# Altium PCB EMG_shield.PcbDoc (part 1 of 3)
Units mm, origin at the board's own origin, x right, y up, seen from the top; angles counter-clockwise.
Board outline 20.05 x 63.8 mm, 6 copper layers (Top Layer, GND/PWR1, SIG1, SIG2, GND/PWR2, Bottom Layer), stack 0.957 mm thick; 130 components, 175 nets, 615 pads, 662 vias.
Unrouted connection lines stored in the file: 5.
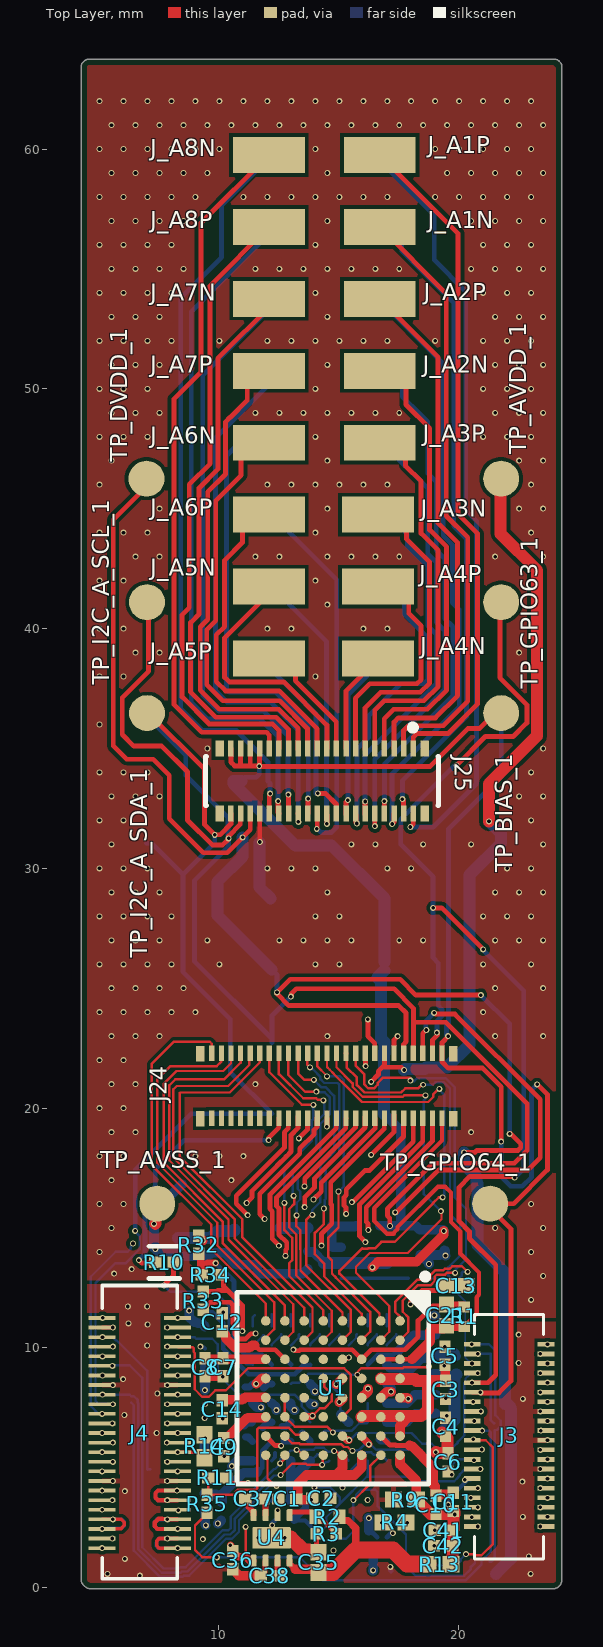
[diagram p0: Top Layer view]
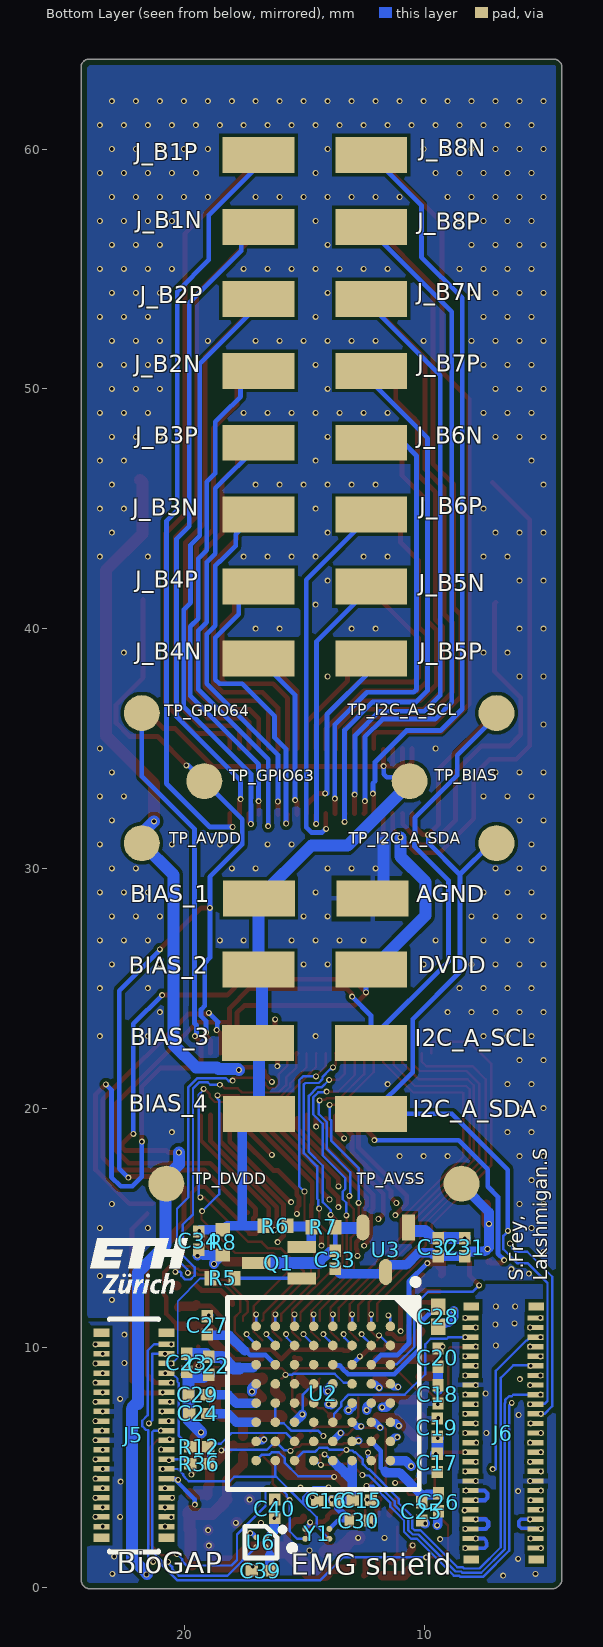
[diagram p1: Bottom Layer view, seen from below]
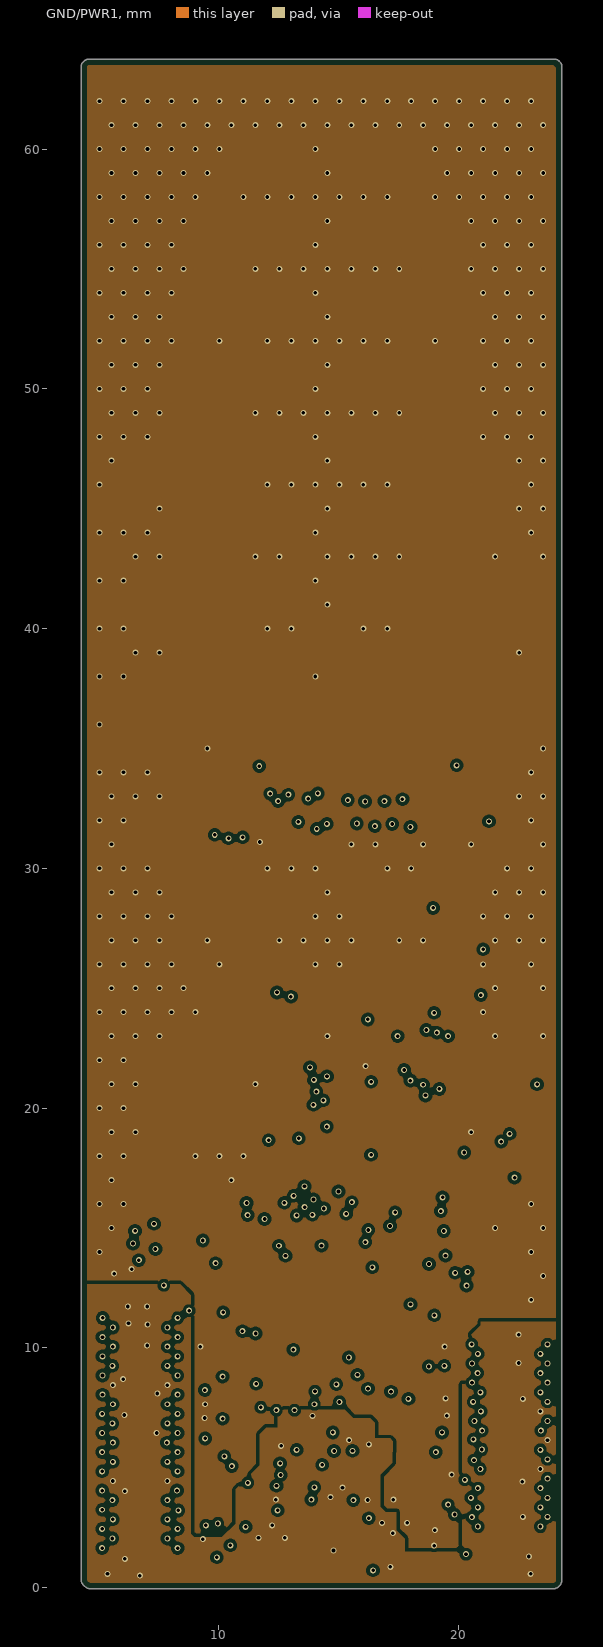
[diagram p2: GND/PWR1]
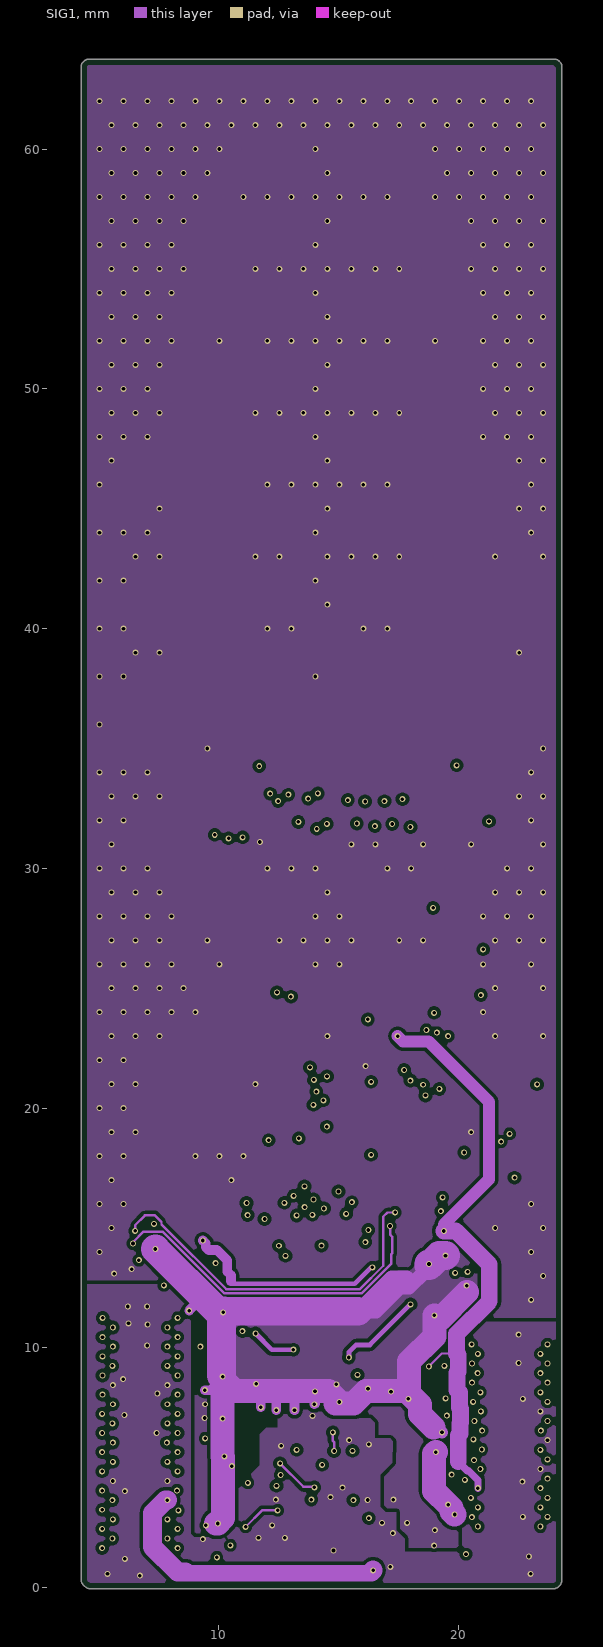
[diagram p3: SIG1]
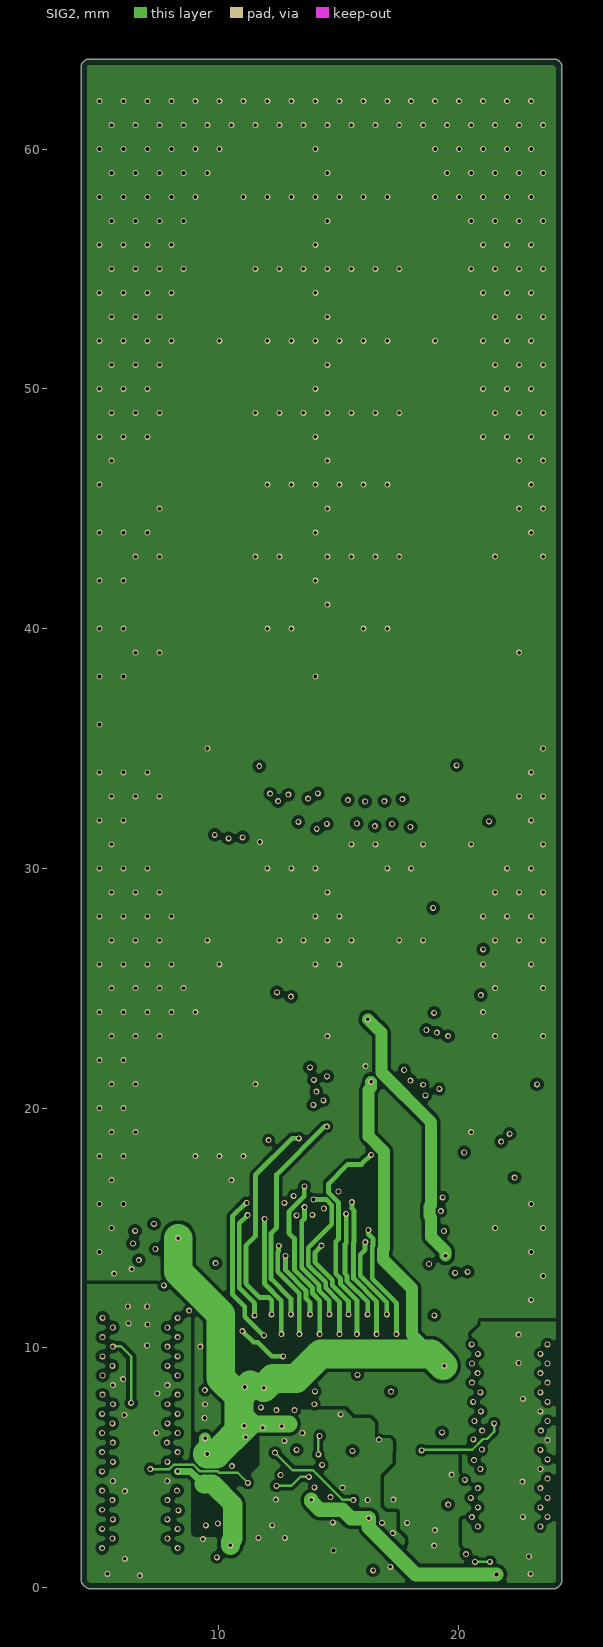
[diagram p4: SIG2]
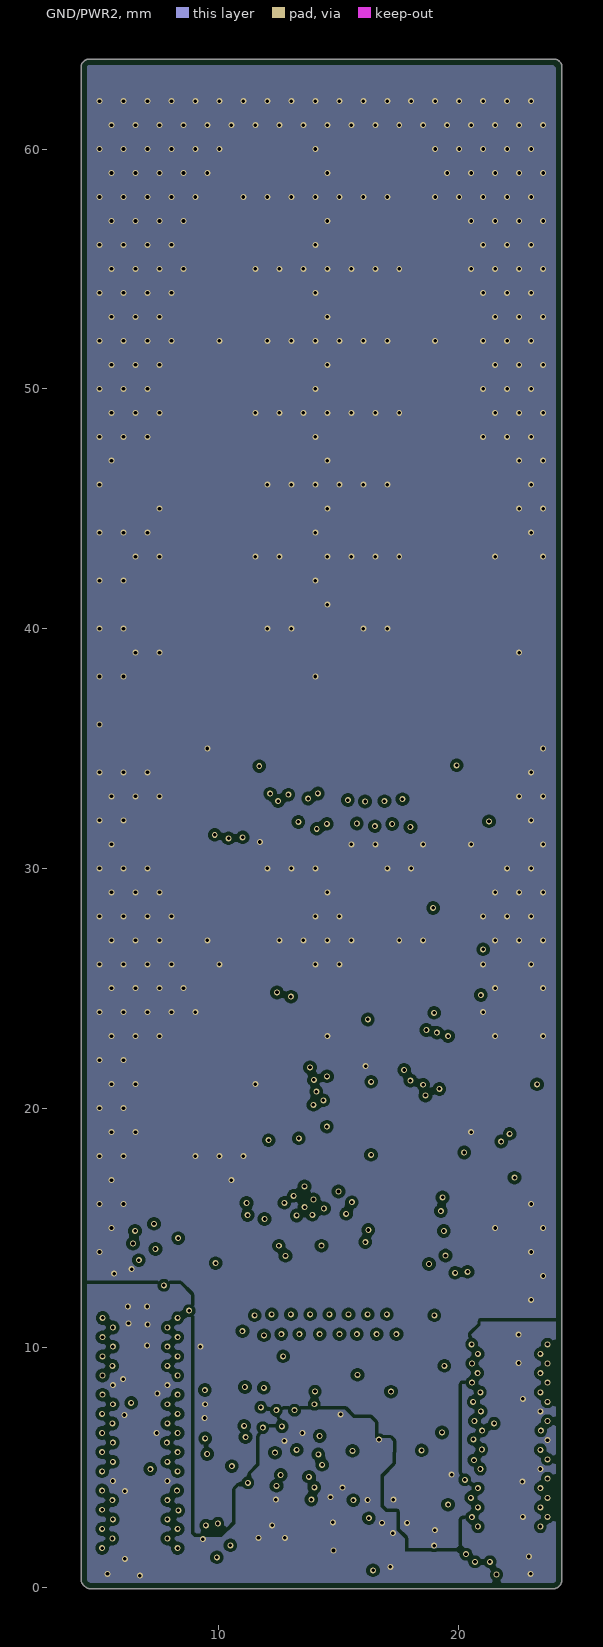
[diagram p5: GND/PWR2]
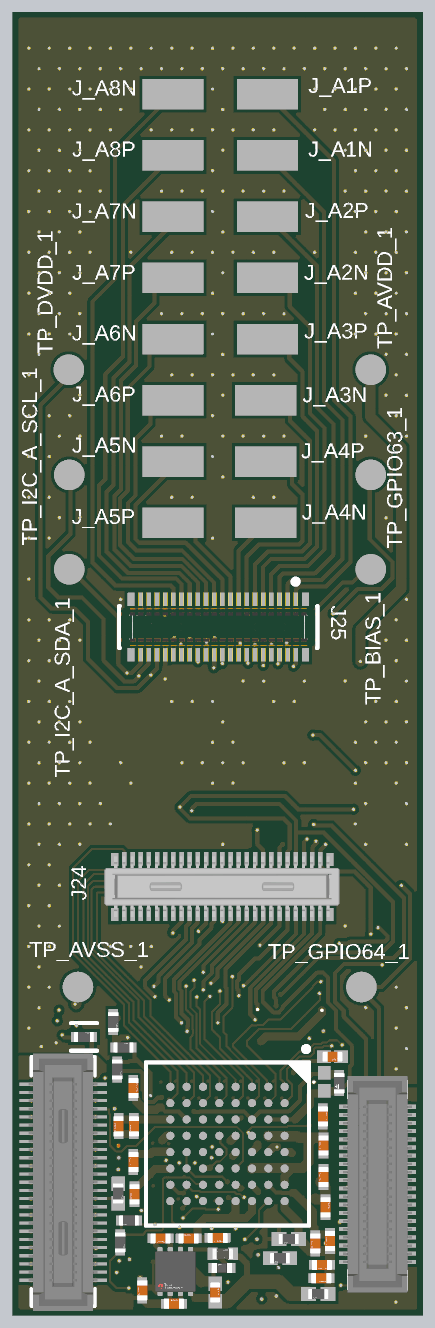
[diagram p8: 3D render of the assembled board from above, using the file's embedded part models]
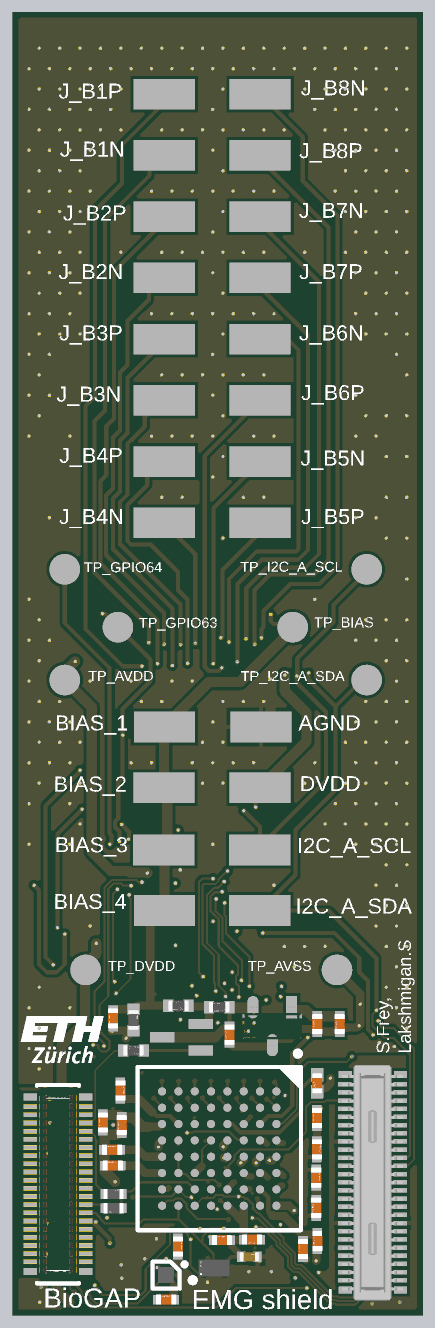
[diagram p9: 3D render of the assembled board from below, using the file's embedded part models]

## Layer stack, top to bottom
Top Solder: solder mask 0.0102, Solder Resist, Dk 3.5
Top Layer: signal copper 0.0175
Dielectric1: prepreg 0.13, PP-021, Dk 4.27
GND/PWR1: signal copper 0.0356
Dielectric2: core 0.13, Core-023, Dk 4.6
SIG1: signal copper 0.0356
Dielectric 1: prepreg 0.13, PP-021, Dk 4.27
Dielectric 2: prepreg 0.13, PP-021, Dk 4.27
SIG2: signal copper 0.0356
Dielectric 3: core 0.13, Core-023, Dk 4.6
GND/PWR2: signal copper 0.0356
Dielectric 4: prepreg 0.13, PP-021, Dk 4.27
Bottom Layer: signal copper 0.0175
Board Layer Stack Bottom Solder: solder mask 0.0102, Solder Resist, Dk 3.5

## Board outline
4.575,63.75 23.975,63.75 cw(c23.975,63.448) 24.188,63.662 24.225,63.625 cw(c24.044,63.444) 24.3,63.444 24.3,0.316 cw(c23.959,0.316) 24.2,0.075 24.181,0.056 cw(c23.925,0.312) 23.925,-0.05 4.677,-0.05 cw(c4.677,0.377) 4.375,0.075 4.356,0.094 cw(c4.612,0.35) 4.25,0.35 4.25,63.425 cw(c4.572,63.417) 4.35,63.65 cw(c4.583,63.429)

## Design rules (kind name [scope] priority, off if disabled: settings)
BoardOutlineClearance [All] p1: gap=0.25 ignorepadtopadclearanceinfootprint=FALSE except(0: Arc-SplitContinuation Track-SplitContinuation SMDPad-SplitContinuation THPad-SplitContinuation Via-SplitContinuation Fill-SplitContinuation Poly-SplitContinuation Region-SplitContinuation Text-SplitContinuation)
Clearance Clearance_2 [InNamedPolygon('AGND_L06_P014')] p1: gap=0.35 ignorepadtopadclearanceinfootprint=FALSE except(0: Arc-Hole Track-Hole SMDPad-Hole THPad-Hole Via-Hole Fill-Hole Poly-Hole Region-Hole Text-Hole)
Clearance Clearance_1 [InNamedPolygon('AGND_L06_P014')] p2: gap=0.254 ignorepadtopadclearanceinfootprint=FALSE except(0: Arc-Hole Track-Hole SMDPad-Hole THPad-Hole Via-Hole Fill-Hole Poly-Hole Region-Hole Text-Hole)
Clearance [InNamedPolygon('AGND_L06_P014')] p3: gap=0.5 ignorepadtopadclearanceinfootprint=FALSE
Clearance Clearance-xPP-xTP-xTT [All] p4: gap=0.1 ignorepadtopadclearanceinfootprint=TRUE except(0.075: Arc-Arc Arc-Track Track-Track; 0.15: Arc-Fill Arc-Poly Arc-Region Track-Fill Track-Poly Track-Region SMDPad-Fill SMDPad-Poly SMDPad-Region THPad-Fill THPad-Poly THPad-Region Via-Fill Via-Poly Via-Region Fill-Fill Fill-Poly Fill-Region Poly-Poly Poly-Region Region-Region)
ComponentClearance ComponentClearance_Mechanical [OnMechanical] p1: gap=0 collisioncheckmode=3 verticalgap=0 showdistances=FALSE
ComponentClearance [All] p2: gap=0.1 collisioncheckmode=3 verticalgap=0.1 showdistances=FALSE
DiffPairsRouting [All] p1: maxlimit=0.25 minlimit=0.15 mostfreqgap=0.25 toplayer_minwidth=0.15 toplayer_maxwidth=0.4 toplayer_prefwidth=0.2 midlayer1_minwidth=0.15 midlayer1_maxwidth=0.4 midlayer1_prefwidth=0.2 midlayer2_mingap=0.25 midlayer2_minwidth=0.381 midlayer2_maxwidth=0.381 midlayer2_prefwidth=0.381 midlayer3_mingap=0.25 midlayer3_minwidth=0.381 midlayer3_maxwidth=0.381 midlayer3_prefwidth=0.381 midlayer4_minwidth=0.15 midlayer4_maxwidth=0.4 midlayer4_prefwidth=0.2 bottomlayer_minwidth=0.15 bottomlayer_maxwidth=0.4 bottomlayer_prefwidth=0.2 maxuncoupledlength=12.5
Height [All] p1: minheight=0 maxheight=25 prefheight=12.5
HoleSize HoleSize-VIA [IsVia] p1: absolutevalues=TRUE maxlimit=6.2 minlimit=0.15 maxpercent=80.000 minpercent=20.000
HoleSize HoleSize-PTH [All] p2: absolutevalues=TRUE maxlimit=6.2 minlimit=0.2 maxpercent=80.000 minpercent=20.000
HoleToHoleClearance [All] p1: gap=0.3 allowstackedmicrovias=FALSE
MatchedLengths MatchedLengths_D100_InPair [InDifferentialPairClass('100Ohm')] p1: tolerance=0.1 checknetsindiffpair=TRUE checkdiffpairvsdiffpair=FALSE checkxsignals=FALSE checkothers=FALSE
MatchedLengths MatchedLengths_D100 [InDifferentialPairClass('100Ohm')] p2: tolerance=0.2 checknetsindiffpair=FALSE checkdiffpairvsdiffpair=TRUE checkxsignals=TRUE checkothers=TRUE
MaximumViaCount MaximumViaCount_D100 [InDifferentialPairClass('100Ohm')] p1: limit=2
MinimumSolderMaskSliver [All] p1: minsoldermaskwidth=0.08
PlaneClearance PlaneClearance-IPI [All] p1: clearance=0.25
PlaneConnect [All] p1: planeconnectstyle=Relief reliefexpansion=0.175 reliefentries=4 reliefconductorwidth=0.2 reliefairgap=0.2
PolygonConnect PolygonConnect-xTW [All] p1: thpad.connectstyle=Relief thpad.reliefconductorwidth=0.2 thpad.reliefentries=4 thpad.polygonreliefangle="90 Angle" thpad.airgapwidth=0.2 smdpad.connectstyle=Relief smdpad.reliefconductorwidth=0.2 smdpad.reliefentries=4 smdpad.polygonreliefangle="90 Angle" smdpad.airgapwidth=0.2 via.connectstyle=Direct via.reliefconductorwidth=0.2 via.reliefentries=4 via.polygonreliefangle="90 Angle" via.airgapwidth=0.2
ReturnPath ReturnPath_S50 [InNetClass('50Ohm')] p1: impedanceprofileid={A2B40DEE-A9E4-4B6C-8169-857D678A89D5} _gaplimit=2.3
ReturnPath ReturnPath_D100 [InDifferentialPairClass('100Ohm')] p2: impedanceprofileid={66C9644C-2042-4FCB-B803-7A79EBC78C8C} _gaplimit=2.3
RoutingCorners [All] p1: cornerstyle=45-Degree minsetback=2.5 maxsetback=2.5
RoutingVias [All] p1: holewidth=0.15 width=0.25 viastyle="Through Hole" minholewidth=0.15 minwidth=0.25 maxholewidth=0.15 maxwidth=0.25 // finishet hole size <= 0.45mm
SilkToSilkClearance [All] p1: silktosilkclearance=0
SilkToSolderMaskClearance SilkscreenOverComponentPads [IsPad] p1: minsilkscreentomaskgap=0.05 clearancetoexposedcopper=TRUE
SolderMaskExpansion SolderMaskExpansion_VIA [(ObjectKind = 'Via')] p1: expansion=0 istentingtop=TRUE
SolderMaskExpansion [All] p2: expansion=0 istentingtop=FALSE
SupplyNets "Schematic Supply Nets_13" [InNet('AVSS')] p1: voltage=0.000
SupplyNets "Schematic Supply Nets_12" [InNet('VA1')] p2: voltage=0.000
SupplyNets "Schematic Supply Nets_11" [InNet('1V8')] p3: voltage=0.000
SupplyNets "Schematic Supply Nets_10" [InNet('VD2')] p4: voltage=0.000
SupplyNets "Schematic Supply Nets_9" [InNet('DVDD')] p5: voltage=0.000
SupplyNets "Schematic Supply Nets_8" [InNet('VD1')] p6: voltage=0.000
SupplyNets "Schematic Supply Nets_7" [InNet('Vsys')] p7: voltage=0.000
SupplyNets "Schematic Supply Nets_6" [InNet('VD0')] p8: voltage=0.000
SupplyNets "Schematic Supply Nets_5" [InNet('-1.5V')] p9: voltage=0.000
SupplyNets "Schematic Supply Nets_4" [InNet('AGND')] p10: voltage=0.000
SupplyNets "Schematic Supply Nets_3" [InNet('GND')] p11: voltage=0.000
SupplyNets "Schematic Supply Nets_2" [InNet('VA0')] p12: voltage=0.000
SupplyNets "Schematic Supply Nets_1" [InNet('AVDD')] p13: voltage=0.000
SupplyNets "Schematic Supply Nets" [InNet('Vbat')] p14: voltage=0.000
UnRoutedNet [All] p1: checkbadconnections=TRUE
Width Width_S50 [InNetClass('50Ohm')] p1: maxlimit=0.305 minlimit=0.104 preferedwidth=0.115 bottomlayer_minwidth=0.178 bottomlayer_prefwidth=0.246 impedanceprofiledriven=TRUE impedanceprofileid={A2B40DEE-A9E4-4B6C-8169-857D678A89D5} impedanceprofilevalue=50.000000 minimp=50.000000 maximp=50.000000 favimp=50.000000
Width Width-xTW [All] p2: maxlimit=1.5 minlimit=0.075 preferedwidth=0.1
Width [InNetClass('Power')] p3: maxlimit=2 minlimit=0.15 preferedwidth=0.2 midlayer2_minwidth=0.254 midlayer2_maxwidth=0.254 midlayer2_prefwidth=0.254 midlayer3_minwidth=0.254 midlayer3_maxwidth=0.254 midlayer3_prefwidth=0.254 minimp=50.000000 maximp=50.000000 favimp=50.000000
18 further rules are at their usual default settings.

## Classes and differential pairs
component class 03_electrode_interface_new: AGND BIAS_1 BIAS_2 BIAS_3 BIAS_4 DVDD I2C_A_SCL I2C_A_SDA J24 J25 J_A1N J_A1P J_A2N J_A2P J_A3N J_A3P J_A4N J_A4P J_A5N J_A5P J_A6N J_A6P J_A7N J_A7P J_A8N J_A8P J_B1N J_B1P J_B2N J_B2P J_B3N J_B3P J_B4N J_B4P J_B5N J_B5P J_B6N J_B6P J_B7N J_B7P J_B8N J_B8P TP_AVDD TP_AVDD_1 TP_AVSS TP_AVSS_1 TP_BIAS TP_BIAS_1 TP_DVDD TP_DVDD_1 TP_GPIO63 TP_GPIO63_1 TP_GPIO64 TP_GPIO64_1 TP_I2C_A_SCL TP_I2C_A_SCL_1 TP_I2C_A_SDA TP_I2C_A_SDA_1
component class 01_power: C35 C36 C37 C38 C39 C40 C41 C42 R2 R3 R13 R14 U4 U6
component class 02_AFE: C1 C2 C3 C4 C5 C6 C7 C8 C9 C10 C11 C12 C13 C14 C15 C16 C17 C18 C19 C20 C21 C22 C23 C24 C25 C26 C27 C28 C29 C30 C31 C32 C33 C34 Q1 R1 R4 R5 R6 R7 R8 R9 R10 R11 R12 R32 R33 R34 R35 R36 U1 U2 U3 Y1
net class CSI2_DATA: CSI_D0_N CSI_D0_P
net class CSI2_CLK: CSI_CLK_N CSI_CLK_P
component class 04_gap_interface: J3 J4 J5 J6

## Components (designator, comment, footprint, x,y, rotation, side; value= is the part's Value field where it differs from the comment)
AGND "0603_pad1_37" "0603_PAD_2 - duplicate37" 12.15,28.75 r180 bottom
BIAS_1 "0603_pad1_17" "0603_PAD_2 - duplicate17" 21.268,33 r180 bottom
BIAS_2 "0603_pad1_18" "0603_PAD_2 - duplicate18" 26.531,35.025 r180 bottom
BIAS_3 "0603_pad1_19" "0603_PAD_2 - duplicate19" 26.139,36.225 r180 bottom
BIAS_4 "0603_pad1_20" "0603_PAD_2 - duplicate20" 21.616,28.013 r180 bottom
C1 "CL05A104KA5NNNC" FP-CL278-IPC_C 12.85,3.7 r180 top value=0.1uF
C2 "CL05A105KP5NNNC" FP-CL511-IPC_C 14.271,3.725 r0 top value=1uF
C3 "CL05A104KA5NNNC" FP-CL278-IPC_C 19.45,8.25 r270 top value=0.1uF
C4 "CL05A104KA5NNNC" FP-CL278-IPC_C 19.45,6.704 r270 top value=0.1uF
C5 "CL05A105KP5NNNC" FP-CL511-IPC_C 19.425,9.675 r90 top value=1uF
C6 "CL05A105KP5NNNC" FP-CL511-IPC_C 19.55,5.225 r90 top value=1uF
C7 "CL05A104KA5NNNC" FP-CL278-IPC_C 10.167,9.194 r270 top value=0.1uF
C8 "CL05A106MP8NUB8" FP-CL07-IPC_C 9.417,9.194 r270 top value=10uF
C9 "CL05A105KP5NNNC" FP-CL511-IPC_C 10.192,5.861 r270 top value=1uF
C10 "CL05A104KA5NNNC" FP-CL278-IPC_C 19.05,3.45 r270 top value=0.1uF
C11 "CL05A105KP5NNNC" FP-CL511-IPC_C 19.775,3.575 r270 top value=1uF
C12 "CL05A105KP5NNNC" FP-CL511-IPC_C 10.142,11.069 r90 top value=1uF
C13 "04025C102KAT2A" FP-0402-L_1_0_1-W_0_5_0_1-IPC_B 19.9,12.6 r0 top value=1nF
C14 "CL05A226MQ5QUNC" FP-CL746-IPC_C 10.142,7.44 r270 top value=22uF
C15 "CL05A104KA5NNNC" FP-CL278-IPC_C 12.592,3.64 r180 bottom value=0.1uF
C16 "CL05A105KP5NNNC" FP-CL511-IPC_C 14.067,3.615 r0 bottom value=1uF
C17 "CL05A104KA5NNNC" FP-CL278-IPC_C 9.45,5.2 r270 bottom value=0.1uF
C18 "CL05A104KA5NNNC" FP-CL278-IPC_C 9.417,8.061 r90 bottom value=0.1uF
C19 "CL05A105KP5NNNC" FP-CL511-IPC_C 9.45,6.675 r90 bottom value=1uF
C20 "CL05A105KP5NNNC" FP-CL511-IPC_C 9.417,9.594 r270 bottom value=1uF
C21 "GRM155R71H152KA01D" CAPC1005X55X25NL05T10 19.492,11.365 r270 top value=1.5nF
C22 "CL05A104KA5NNNC" FP-CL278-IPC_C 18.975,9.254 r270 bottom value=0.1uF
C23 "CL05A106MP8NUB8" FP-CL07-IPC_C 19.9,9.379 r270 bottom value=10uF
C24 "CL05A105KP5NNNC" FP-CL511-IPC_C 19.417,7.265 r0 bottom value=1uF
C25 "CL05A104KA5NNNC" FP-CL278-IPC_C 10.1,3.179 r270 bottom value=0.1uF
C26 "CL05A105KP5NNNC" FP-CL511-IPC_C 9.392,3.565 r270 bottom value=1uF
C27 "CL05A105KP5NNNC" FP-CL511-IPC_C 19.042,10.94 r90 bottom value=1uF
C28 "04025C102KAT2A" FP-0402-L_1_0_1-W_0_5_0_1-IPC_B 9.4,11.3 r270 bottom value=1nF
C29 "CL05A226MQ5QUNC" FP-CL746-IPC_C 19.446,8.04 r0 bottom value=22uF
C30 "CGA2B3X7R1V103K050BB" FP-CGA2B-MFG 12.725,2.8 r180 bottom value=10nF
C31 "CL05A106MP8NUB8" FP-CL07-IPC_C 8.3,14.2 r270 bottom value=10uF
C32 "CL05A104KA5NNNC" FP-CL278-IPC_C 9.4,14.2 r270 bottom value=0.1uF
C33 "CL05A104KA5NNNC" FP-CL278-IPC_C 13.7,13.679 r270 bottom value=0.1uF
C34 "CL05A104KA5NNNC" FP-CL278-IPC_C 19.4,14.479 r270 bottom value=0.1uF
C35 "GRM155Z71A225KE01D" FP-GRM155-0_15-IPC_B 14.15,1.052 r90 top value=2.2uF
C36 "CL05A475MP5NRNC" FP-CL282-IPC_C 10.575,1.154 r270 top value=4.7uF
C37 "CL05A105KP5NNNC" FP-CL511-IPC_C 11.475,3.7 r0 top value=1uF
C38 "CL05A475MP5NRNC" FP-CL282-IPC_C 12.125,0.5 r180 top value=4.7uF
C39 "CL05A105KP5NNNC" FP-CL511-IPC_C 16.8,0.7 r0 bottom value=1uF
C40 "CL05A104KA5NNNC" FP-CL278-IPC_C 16.225,3.3 r90 bottom value=0.1uF
C41 "CL05A104KA5NNNC" FP-CL278-IPC_C 19.375,2.4 r0 top value=0.1uF
C42 "CL05A105KP5NNNC" FP-CL511-IPC_C 19.346,1.75 r0 top value=1uF
DVDD "0603_pad1_38" "0603_PAD_2 - duplicate38" 12.2,25.775 r0 bottom
I2C_A_SCL "0603_pad1_39" "0603_PAD_2 - duplicate39" 12.213,22.725 r180 bottom
I2C_A_SDA "0603_pad1_40" "0603_PAD_2 - duplicate40" 12.213,19.763 r180 bottom
J3 "DF40HC(2.5)-40DS-0.4V(51)" DF40HC3040DS04V51 22.1,6.35 r270 top locked
J4 "DF40HC(2.5)-50DS-0.4V(51)" DF40HC3050DS04V51 6.7,6.45 r90 top locked
J5 "DF40C-40DP-0.4V(51)" FP-DF40C-40DP-0_4V_51-MFG 22.1,6.35 r270 bottom locked
J6 "DF40C-50DP-0.4V(51)" CONN_COMBI_50P 6.7,6.45 r0 bottom locked
J24 "DF40C-50DP-0.4V(51)" CONN_COMBI_50P 14.5,20.935 r90 top
J25 "DF40C-40DP-0.4V(51)" FP-DF40C-40DP-0_4V_51-MFG 14.3,33.645 r180 top
J_A1N "0603_pad1_2" "0603_PAD_2 - duplicate2" 16.705,56.75 r0 top
J_A1P "0603_pad1_1" "0603_PAD_2 - duplicate1" 16.705,59.75 r0 top
J_A2N "0603_pad1_4" "0603_PAD_2 - duplicate4" 16.705,50.75 r0 top
J_A2P "0603_pad1_3" "0603_PAD_2 - duplicate3" 16.705,53.75 r180 top
J_A3N "0603_pad1_6" "0603_PAD_2 - duplicate6" 16.626,44.75 r0 top
J_A3P "0603_pad1_5" "0603_PAD_2 - duplicate5" 16.705,47.75 r0 top
J_A4N "0603_pad1_8" "0603_PAD_2 - duplicate8" 16.626,38.75 r0 top
J_A4P "0603_pad1_7" "0603_PAD_2 - duplicate7" 16.626,41.75 r0 top
J_A5N "0603_pad1_10" "0603_PAD_2 - duplicate10" 12.08,41.75 r0 top
J_A5P "0603_pad1_9" "0603_PAD_2 - duplicate9" 12.08,38.75 r0 top
J_A6N "0603_pad1_12" "0603_PAD_2 - duplicate12" 12.08,47.75 r0 top
J_A6P "0603_pad1_11" "0603_PAD_2 - duplicate11" 12.08,44.75 r0 top
J_A7N "0603_pad1_14" "0603_PAD_2 - duplicate14" 12.08,53.75 r0 top
J_A7P "0603_pad1_13" "0603_PAD_2 - duplicate13" 12.08,50.75 r0 top
J_A8N "0603_pad1_16" "0603_PAD_2 - duplicate16" 11.58,59.75 r0 top
J_A8P "0603_pad1_15" "0603_PAD_2 - duplicate15" 12.08,56.75 r0 top
J_B1N "0603_pad1_22" "0603_PAD_2 - duplicate22" 16.9,56.75 r180 bottom
J_B1P "0603_pad1_21" "0603_PAD_2 - duplicate21" 16.977,59.75 r180 bottom
J_B2N "0603_pad1_24" "0603_PAD_2 - duplicate24" 16.9,50.75 r180 bottom
J_B2P "0603_pad1_23" "0603_PAD_2 - duplicate23" 16.9,53.75 r180 bottom
J_B3N "0603_pad1_26" "0603_PAD_2 - duplicate26" 16.9,44.75 r180 bottom
J_B3P "0603_pad1_25" "0603_PAD_2 - duplicate25" 16.9,47.75 r180 bottom
J_B4N "0603_pad1_28" "0603_PAD_2 - duplicate28" 16.9,38.75 r180 bottom
J_B4P "0603_pad1_27" "0603_PAD_2 - duplicate27" 16.9,41.75 r180 bottom
J_B5N "0603_pad1_30" "0603_PAD_2 - duplicate30" 12.2,41.75 r180 bottom
J_B5P "0603_pad1_29" "0603_PAD_2 - duplicate29" 12.2,38.75 r180 bottom
J_B6N "0603_pad1_32" "0603_PAD_2 - duplicate32" 12.2,47.75 r180 bottom
J_B6P "0603_pad1_31" "0603_PAD_2 - duplicate31" 12.2,44.75 r180 bottom
J_B7N "0603_pad1_34" "0603_PAD_2 - duplicate34" 12.2,53.75 r180 bottom
J_B7P "0603_pad1_33" "0603_PAD_2 - duplicate33" 12.2,50.75 r180 bottom
J_B8N "0603_pad1_36" "0603_PAD_2 - duplicate36" 12.105,59.75 r180 bottom
J_B8P "0603_pad1_35" "0603_PAD_2 - duplicate35" 12.2,56.75 r180 bottom
Q1 "PMSS3906" SOT323_N 16.05,13.55 r0 bottom
R1 "MCS04020C1004FE000" FP-MCS0402-IPC_C 20.225,11.3 r270 top value=1MR
R2 "RT0402BRD0745K3L" FP-RT0402-MFG 14.522,2.95 r0 top value=45.3KΩ
R3 "RN73R1ETTP2003B25" FP-RN73R1E-IPC_C 14.475,2.25 r180 top value=200k
R4 "RC0402FR-070RL" FP-RC0402-0_4-IPC_A 17.321,2.725 r180 top value=0R
R5 "RT0402FRE074K7L" FP-RT0402-MFG 18.4,12.9 r180 bottom value=4.7KΩ
R6 "RT0402FRE074K7L" FP-RT0402-MFG 16.2,15.1 r0 bottom value=4.7KΩ
R7 "RT0402FRE074K7L" FP-RT0402-MFG 14.2,15.025 r0 bottom value=4.7KΩ
R8 "RR0510P-563-D" FP-RR0510-MFG 18.4,14.4 r90 bottom value=56k
R9 "RC0402FR-070RL" FP-RC0402-0_4-IPC_A 17.75,3.675 r180 top
R10 "RC0402FR-070RL" FP-RC0402-0_4-IPC_C 7.722,13.566 r0 top value=0R
R11 "RC0402FR-070RL" FP-RC0402-0_4-IPC_C 9.925,4.575 r180 top value=0R
R12 "RC0402FR-070RL" FP-RC0402-0_4-IPC_C 19.375,5.875 r180 bottom value=0R
R13 "RC0402FR-070RL" FP-RC0402-0_4-IPC_A 19.196,0.975 r180 top value=0R
R14 "RC0402FR-070RL" FP-RC0402-0_4-IPC_A 9.4,5.9 r270 top value=0R
R32 "RC0402FR-070RL" FP-RC0402-0_4-IPC_C 9.15,14.3 r270 top
R33 "RC0402FR-070RL" FP-RC0402-0_4-IPC_C 9.35,11.971 r270 top value=0R
R34 "RC0402FR-070RL" FP-RC0402-0_4-IPC_C 9.654,13.05 r0 top
R35 "RC0402FR-070RL" FP-RC0402-0_4-IPC_C 9.5,3.5 r270 top
R36 "RC0402FR-070RL" FP-RC0402-0_4-IPC_C 19.375,5.175 r0 bottom
TP_AVDD "TP_AVDD" TP_AVDD 21.768,31.05 r90 bottom
TP_AVDD_1 "TP_AVDD" TP_AVDD 21.768,46.25 r90 top
TP_AVSS "TP_AVSS" TP_AVSS 8.433,16.85 r0 bottom
TP_AVSS_1 "TP_AVSS" TP_AVSS 7.425,16.013 r90 top
TP_BIAS "TP_BIAS" TP_BIAS 10.6,33.638 r180 bottom
TP_BIAS_1 "TP_BIAS" TP_BIAS 21.768,36.475 r90 top
TP_DVDD "TP_DVDD" TP_DVDD 20.745,16.85 r180 bottom
TP_DVDD_1 "TP_DVDD" TP_DVDD 6.979,46.25 r90 top
TP_GPIO63 "TP_GPIO63" TP_GPIO63 19.164,33.638 r180 bottom
TP_GPIO63_1 "TP_GPIO63" TP_GPIO63 21.768,41.1 r90 top
TP_GPIO64 "TP_GPIO64" TP_GPIO64 21.768,36.475 r90 bottom
TP_GPIO64_1 "TP_GPIO64" TP_GPIO64 21.311,16.013 r90 top
TP_I2C_A_SCL "TP_I2C_A_SCL" TP_I2C_A_SCL 6.979,36.475 r180 bottom
TP_I2C_A_SCL_1 "TP_I2C_A_SCL" TP_I2C_A_SCL 7,41.1 r90 top
TP_I2C_A_SDA "TP_I2C_A_SDA" TP_I2C_A_SDA 6.979,31.05 r90 bottom
TP_I2C_A_SDA_1 "TP_I2C_A_SDA" TP_I2C_A_SDA 7,36.475 r90 top
U1 "ADS1298RIZXGT" TI-ZXG64 14.75,8.325 r270 top
U2 "ADS1298RIZXGT" TI-ZXG64 14.2,8.1 r270 bottom
U3 "ISL21080CIH320Z-TK" FP-P3_064A-IPC_C 11.6,14.095 r270 bottom
U4 "LM27761DSGT" FP-DSG0008A-MFG 12.197,2.075 r90 top
U6 "TPS22916CYFPR" BGA4C40P2X2_78X78X50 16.8,1.9 r270 bottom
Y1 "SIT8021AC-J3-18S-2.048000" FP-SiT8021-MFG 14.45,2.245 r180 bottom

## Footprints (in the part's own frame and the unit in brackets; to place one, negate y for a bottom-side part, rotate by r counter-clockwise, add the part's x,y. Pads: shape width x height; smd on the part's side, far side on the other; paste and mask are expansions set on the pad)
"0603_PAD_2 - duplicate1" [mm]
  rect 3x1.5 smd: 1(0,0)
"0603_PAD_2 - duplicate2" [mm]
  rect 3x1.5 smd: 2(0,0)
"0603_PAD_2 - duplicate3" [mm]
  rect 3x1.5 smd: 3(0,0)
"0603_PAD_2 - duplicate4" [mm]
  rect 3x1.5 smd: 4(0,0)
"0603_PAD_2 - duplicate5" [mm]
  rect 3x1.5 smd: 5(0,0)
"0603_PAD_2 - duplicate6" [mm]
  rect 3x1.5 smd: 6(0,0)
"0603_PAD_2 - duplicate7" [mm]
  rect 3x1.5 smd: 7(0,0)
"0603_PAD_2 - duplicate8" [mm]
  rect 3x1.5 smd: 8(0,0)
"0603_PAD_2 - duplicate9" [mm]
  rect 3x1.5 smd: 9(0,0)
"0603_PAD_2 - duplicate10" [mm]
  rect 3x1.5 smd: 10(0,0)
"0603_PAD_2 - duplicate11" [mm]
  rect 3x1.5 smd: 11(0,0)
"0603_PAD_2 - duplicate12" [mm]
  rect 3x1.5 smd: 12(0,0)
"0603_PAD_2 - duplicate13" [mm]
  rect 3x1.5 smd: 13(0,0)
"0603_PAD_2 - duplicate14" [mm]
  rect 3x1.5 smd: 14(0,0)
"0603_PAD_2 - duplicate15" [mm]
  rect 3x1.5 smd: 15(0,0)
"0603_PAD_2 - duplicate16" [mm]
  rect 3x1.5 smd: 16(0.5,0)
"0603_PAD_2 - duplicate17" [mm]
  rect 3x1.5 smd: 17(4.381,-4.25)
"0603_PAD_2 - duplicate18" [mm]
  rect 3x1.5 smd: 18(9.624,-9.25)
"0603_PAD_2 - duplicate19" [mm]
  rect 3x1.5 smd: 19(9.219,-13.5)
"0603_PAD_2 - duplicate20" [mm]
  rect 3x1.5 smd: 20(4.729,-8.25)
"0603_PAD_2 - duplicate21" [mm]
  rect 3x1.5 smd: 21(0.077,0)
"0603_PAD_2 - duplicate22" [mm]
  rect 3x1.5 smd: 22(0,0)
"0603_PAD_2 - duplicate23" [mm]
  rect 3x1.5 smd: 23(0,0)
"0603_PAD_2 - duplicate24" [mm]
  rect 3x1.5 smd: 24(0,0)
"0603_PAD_2 - duplicate25" [mm]
  rect 3x1.5 smd: 25(0,0)
"0603_PAD_2 - duplicate26" [mm]
  rect 3x1.5 smd: 26(0,0)
"0603_PAD_2 - duplicate27" [mm]
  rect 3x1.5 smd: 27(0,0)
"0603_PAD_2 - duplicate28" [mm]
  rect 3x1.5 smd: 28(0,0)
"0603_PAD_2 - duplicate29" [mm]
  rect 3x1.5 smd: 29(0,0)
"0603_PAD_2 - duplicate30" [mm]
  rect 3x1.5 smd: 30(0,0)
"0603_PAD_2 - duplicate31" [mm]
  rect 3x1.5 smd: 31(0,0)
"0603_PAD_2 - duplicate32" [mm]
  rect 3x1.5 smd: 32(0,0)
"0603_PAD_2 - duplicate33" [mm]
  rect 3x1.5 smd: 33(0,0)
"0603_PAD_2 - duplicate34" [mm]
  rect 3x1.5 smd: 34(0,0)
"0603_PAD_2 - duplicate35" [mm]
  rect 3x1.5 smd: 35(0,0)
"0603_PAD_2 - duplicate36" [mm]
  rect 3x1.5 smd: 36(-0.095,0)
"0603_PAD_2 - duplicate37" [mm]
  rect 3x1.5 smd: 37(0,0)
"0603_PAD_2 - duplicate38" [mm]
  rect 3x1.5 smd: 38(0,0)
"0603_PAD_2 - duplicate39" [mm]
  rect 3x1.5 smd: 39(0,0)
"0603_PAD_2 - duplicate40" [mm]
  rect 3x1.5 smd: 40(0,0)
BGA4C40P2X2_78X78X50 [mm]
  round 0.226 smd: A1(-0.2,0.2) A2(0.2,0.2) B1(-0.2,-0.2) B2(0.2,-0.2)
  silkscreen extent -0.66,-0.66 0.66,1, body extent -0.39,-0.39 0.39,0.39, height 0.5
CAPC1005X55X25NL05T10 [mm] "Chip Capacitor, 2-Leads, Body 1.00x0.50mm, IPC Medium Density"
  rect 0.66x0.62 smd: 1(-0.44,0) 2(0.44,0)
  body extent -0.53,-0.28 0.53,0.27, height 0.55
CONN_COMBI_50P [mm] "50Pin 0.4mm pitch connector footprint that accepts (male) connectors intended for different stacking heights:  Hirose - DF40C-50DP-0.4V(51) for 1.5mm - 3mm stacking height , JAE - WP7B-P050VA1-R8000 - for 0.7mm stacking height"
  rect 0.66x0.22 smd: 1(1.355,4.8) 2(1.355,4.4) 3(1.355,4) 4(1.355,3.6) 5(1.355,3.2) 6(1.355,2.8) 7(1.355,2.4) 8(1.355,2) 9(1.355,1.6) 10(1.355,1.2) 11(1.355,0.8) 12(1.355,0.4) 13(1.355,0) 14(1.355,-0.4) 15(1.355,-0.8) 16(1.355,-1.2) 17(1.355,-1.6) 18(1.355,-2) 19(1.355,-2.4) 20(1.355,-2.8) 21(1.355,-3.2) 22(1.355,-3.6) 23(1.355,-4) 24(1.355,-4.4) 25(1.355,-4.8) 26(-1.355,-4.8) 27(-1.355,-4.4) 28(-1.355,-4) 29(-1.355,-3.6) 30(-1.355,-3.2) 31(-1.355,-2.8) 32(-1.355,-2.4) 33(-1.355,-2) 34(-1.355,-1.6) 35(-1.355,-1.2) 36(-1.355,-0.8) 37(-1.355,-0.4) 38(-1.355,0) 39(-1.355,0.4) 40(-1.355,0.8) 41(-1.355,1.2) 42(-1.355,1.6) 43(-1.355,2) 44(-1.355,2.4) 45(-1.355,2.8) 46(-1.355,3.2) 47(-1.355,3.6) 48(-1.355,4) 49(-1.355,4.4) 50(-1.355,4.8)
  rect 0.65x0.35 smd: 56(-1.375,-5.275) 56(-1.375,5.275) 56(1.325,-5.275) 56(1.325,5.275)
  body extent -1.49,-5.74 1.48,5.78, height 1.14
DF40HC3040DS04V51 [mm]
  rect 0.2x0.7 smd: 1(-3.8,1.54) 2(-3.8,-1.54) 3(-3.4,1.54) 4(-3.4,-1.54) 5(-3,1.54) 6(-3,-1.54) 7(-2.6,1.54) 8(-2.6,-1.54) 9(-2.2,1.54) 10(-2.2,-1.54) 11(-1.8,1.54) 12(-1.8,-1.54) 13(-1.4,1.54) 14(-1.4,-1.54) 15(-1,1.54) 16(-1,-1.54) 17(-0.6,1.54) 18(-0.6,-1.54) 19(-0.2,1.54) 20(-0.2,-1.54) 21(0.2,1.54) 22(0.2,-1.54) 23(0.6,1.54) 24(0.6,-1.54) 25(1,1.54) 26(1,-1.54) 27(1.4,1.54) 28(1.4,-1.54) 29(1.8,1.54) 30(1.8,-1.54) 31(2.2,1.54) 32(2.2,-1.54) 33(2.6,1.54) 34(2.6,-1.54) 35(3,1.54) 36(3,-1.54) 37(3.4,1.54) 38(3.4,-1.54) 39(3.8,1.54) 40(3.8,-1.54)
  silkscreen extent -5.05,-1.44 5.15,1.44, body extent -5.3,-1.69 5.3,1.69, height 2.89
DF40HC3050DS04V51 [mil]
  rect 6x44.56 smd paste+0 mask+0: 1(-188.98,-62) 2(-173.23,-62) 3(-157.48,-62) 4(-141.73,-62) 5(-125.98,-62) 6(-110.24,-62) 7(-94.49,-62) 8(-78.74,-62) 9(-62.99,-62) 10(-47.24,-62) 11(-31.5,-62) 12(-15.75,-62) 13(0,-62) 14(15.75,-62) 15(31.5,-62) 16(47.24,-62) 17(62.99,-62) 18(78.74,-62) 19(94.49,-62) 20(110.24,-62) 21(125.98,-62) 22(141.73,-62) 23(157.48,-62) 24(173.23,-62) 25(188.98,-62) 26(188.98,62) 27(173.23,62) 28(157.48,62) 29(141.73,62) 30(125.98,62) 31(110.24,62) 32(94.49,62) 33(78.74,62) 34(62.99,62) 35(47.24,62) 36(31.5,62) 37(15.75,62) 38(0,62) 39(-15.75,62) 40(-31.5,62) 41(-47.24,62) 42(-62.99,62) 43(-78.74,62) 44(-94.49,62) 45(-110.24,62) 46(-125.98,62) 47(-141.73,62) 48(-157.48,62) 49(-173.23,62) 50(-188.98,62)
  silkscreen extent -239,-62 242,62, body extent -248,-67 248,67, height 114
FP-0402-L_1_0_1-W_0_5_0_1-IPC_B [mm]
  rect 0.681x0.612 smd paste+0 mask+0: 1(-0.416,0) 2(0.416,0)
  body extent -0.91,-0.46 0.91,0.46, height 0.25
FP-CGA2B-MFG [mm]
  rect 0.4x0.5 smd paste+0 mask+0: 1(-0.4,0) 2(0.4,0)
  body extent -0.5,-0.25 0.5,0.25, height 0.55
FP-CL07-IPC_C [mm]
  rect 0.515x0.472 smd paste+0 mask+0: 1(-0.379,0) 2(0.379,0)
  body extent -0.74,-0.38 0.74,0.38, height 0.25
FP-CL278-IPC_C [mm]
  rect 0.515x0.472 smd paste+0 mask+0: 1(-0.379,0) 2(0.379,0)
  body extent -0.74,-0.38 0.74,0.38, height 0.25
FP-CL282-IPC_C [mm]
  rect 0.515x0.472 smd paste+0 mask+0: 1(-0.379,0) 2(0.379,0)
  body extent -0.74,-0.38 0.74,0.38, height 0.25
FP-CL511-IPC_C [mm]
  rect 0.515x0.472 smd paste+0 mask+0: 1(-0.379,0) 2(0.379,0)
  body extent -0.74,-0.38 0.74,0.38, height 0.25
FP-CL746-IPC_C [mm]
  rect 0.515x0.472 smd paste+0 mask+0: 1(-0.379,0) 2(0.379,0)
  body extent -0.74,-0.38 0.74,0.38, height 0.25
FP-DF40C-40DP-0_4V_51-MFG [mm]
  rect 0.23x0.66 smd paste-1000 mask+0: 1(-3.8,-1.355) 2(-3.8,1.355) 3(-3.4,-1.355) 4(-3.4,1.355) 5(-3,-1.355) 6(-3,1.355) 7(-2.6,-1.355) 8(-2.6,1.355) 9(-2.2,-1.355) 10(-2.2,1.355) 11(-1.8,-1.355) 12(-1.8,1.355) 13(-1.4,-1.355) 14(-1.4,1.355) 15(-1,-1.355) 16(-1,1.355) 17(-0.6,-1.355) 18(-0.6,1.355) 19(-0.2,-1.355) 20(-0.2,1.355) 21(0.2,-1.355) 22(0.2,1.355) 23(0.6,-1.355) 24(0.6,1.355) 25(1,-1.355) 26(1,1.355) 27(1.4,-1.355) 28(1.4,1.355) 29(1.8,-1.355) 30(1.8,1.355) 31(2.2,-1.355) 32(2.2,1.355) 33(2.6,-1.355) 34(2.6,1.355) 35(3,-1.355) 36(3,1.355) 37(3.4,-1.355) 38(3.4,1.355) 39(3.8,-1.355) 40(3.8,1.355)
  rect 0.35x0.66 smd paste+0 mask+0: 41(-4.275,1.355) 42(4.275,1.355) 43(-4.275,-1.355) 44(4.275,-1.355)
  silkscreen extent -4.86,-1.02 4.86,1.02, body extent -4.76,-1.49 4.76,1.48, height 1.29
FP-DSG0008A-MFG [mm]
  rrect40% 0.5x0.25 smd paste+0 mask+0: 1(-0.95,0.75) 2(-0.95,0.25) 3(-0.95,-0.25) 4(-0.95,-0.75) 5(0.95,-0.75) 6(0.95,-0.25) 7(0.95,0.25) 8(0.95,0.75)
  rrect11% 0.9x1.6 smd paste-1000 mask+0: 9(0,0)
  body extent -1.3,-1.15 1.3,1.15, height 0.25
FP-GRM155-0_15-IPC_B [mm]
  rect 0.704x0.658 smd paste+0 mask+0: 1(-0.427,0) 2(0.427,0)
  body extent -0.93,-0.48 0.93,0.48, height 0.25
FP-MCS0402-IPC_C [mm]
  rect 0.465x0.472 smd paste+0 mask+0: 1(-0.404,0) 2(0.404,0)
  body extent -0.74,-0.38 0.74,0.38, height 0.25
FP-P3_064A-IPC_C [mm]
  rect 1.084x0.538 smd paste+0 mask+0: 1(-0.93,0.95)
  rrect100% 1.084x0.538 smd paste+0 mask+0: 2(-0.93,-0.95) 3(0.93,0)
  body extent -1.18,-1.46 1.18,1.46, height 1.12
FP-RC0402-0_4-IPC_A [mm]
  rect 0.715x0.672 smd paste+0 mask+0: 1(-0.479,0) 2(0.479,0)
  body extent -1.04,-0.54 1.04,0.54, height 0.25
FP-RC0402-0_4-IPC_C [mm]
  rect 0.515x0.472 smd paste+0 mask+0: 1(-0.379,0) 2(0.379,0)
  silkscreen extent -0.64,-0.67 0.64,0.67, body extent -0.74,-0.38 0.74,0.38, height 0.25
FP-RN73R1E-IPC_C [mm]
  rect 0.488x0.472 smd paste+0 mask+0: 1(-0.414,0) 2(0.414,0)
  body extent -0.76,-0.38 0.76,0.38, height 0.25
FP-RR0510-MFG [mm]
  rect 0.55x0.6 smd paste+0 mask+0: 1(-0.525,0) 2(0.525,0)
  body extent -0.5,-0.25 0.5,0.25, height 0.4
FP-RT0402-MFG [mm]
  rect 0.5x0.6 smd paste+0 mask+0: 1(-0.5,0) 2(0.5,0)
  body extent -0.85,-0.4 0.85,0.4, height 0.25
FP-SiT8021-MFG [mm]
  round 0.25 smd paste+0 mask+0: 1(-0.5,-0.205) 2(0.5,-0.205) 3(0.5,0.205) 4(-0.5,0.205)
  silkscreen extent -1.18,-0.72 -0.93,-0.47, body extent -0.77,-0.42 0.77,0.42, height 0.6
SOT323_N [mm]
  rect 1.2x0.5 smd: 1(-0.95,0.65) 2(-0.95,-0.65) 3(0.95,0)
  body extent -0.7,-1.1 0.7,1.1, height 1.1
TI-ZXG64 [mm] "BGA, 64-Balls, Body 8x8mm, Pitch 0.8mm"
  round 0.4 smd: A1(-2.8,2.8) A2(-2,2.8) A3(-1.2,2.8) A4(-0.4,2.8) A5(0.4,2.8) A6(1.2,2.8) A7(2,2.8) A8(2.8,2.8) B1(-2.8,2) B2(-2,2) B3(-1.2,2) B4(-0.4,2) B5(0.4,2) B6(1.2,2) B7(2,2) B8(2.8,2) C1(-2.8,1.2) C2(-2,1.2) C3(-1.2,1.2) C4(-0.4,1.2) C5(0.4,1.2) C6(1.2,1.2) C7(2,1.2) C8(2.8,1.2) D1(-2.8,0.4) D2(-2,0.4) D3(-1.2,0.4) D4(-0.4,0.4) D5(0.4,0.4) D6(1.2,0.4) D7(2,0.4) D8(2.8,0.4) E1(-2.8,-0.4) E2(-2,-0.4) E3(-1.2,-0.4) E4(-0.4,-0.4) E5(0.4,-0.4) E6(1.2,-0.4) E7(2,-0.4) E8(2.8,-0.4) F1(-2.8,-1.2) F2(-2,-1.2) F3(-1.2,-1.2) F4(-0.4,-1.2) F5(0.4,-1.2) F6(1.2,-1.2) F7(2,-1.2) F8(2.8,-1.2) G1(-2.8,-2) G2(-2,-2) G3(-1.2,-2) G4(-0.4,-2) G5(0.4,-2) G6(1.2,-2) G7(2,-2) G8(2.8,-2) H1(-2.8,-2.8) H2(-2,-2.8) H3(-1.2,-2.8) H4(-0.4,-2.8) H5(0.4,-2.8) H6(1.2,-2.8) H7(2,-2.8) H8(2.8,-2.8)
  silkscreen extent -4.77,-4 4,4, body extent -4,-4 4,4, height 1.45
TP_AVDD [mm]
  round 1.5 smd: 41(0,0)
TP_AVSS [mm]
  round 1.5 smd: 42(0,0)
TP_BIAS [mm]
  round 1.5 smd: 43(0,0)
TP_DVDD [mm]
  round 1.5 smd: 44(0,0)
TP_GPIO63 [mm]
  round 1.5 smd: 47(0,0)
TP_GPIO64 [mm]
  round 1.5 smd: 48(0,0)
TP_I2C_A_SCL [mm]
  round 1.5 smd: 45(0,0)
TP_I2C_A_SDA [mm]
  round 1.5 smd: 46(0,0)

## Part data
C1 C3 C4 C7 C10 C15 C17 C18 C22 C25 C32 C33 C34 C40 C41: library part CMP-13271-000728-1, "Cap Ceramic 100nF 25V X5R ±10% SMD 0402 +85°C Paper T/R", Capacitance=0.1uF, Case Code (Imperial)=0402, Case Code (Metric)=1005, Dielectric=X5R, Max Operating Temperature=85°C, Min Operating Temperature=-55°C, Package Quantity=1, Tolerance=10%, Voltage=25V, Case/Package=0402, Depth=0.5mm, Height=0.5mm, Lead Free="Lead Free", Length=1mm, Mount="Surface Mount", Packaging="Tape and Reel", Radiation Hardening=No, Thickness=0.022inch, Voltage Rating=25V, Voltage Rating (DC)=25V, Width=0.02inch
C2 C5 C6 C9 C11 C12 C16 C19 C20 C24 C26 C27 C37 C39 C42: library part CMP-13271-001936-1, "Cap Ceramic 1uF 10V X5R ±10% SMD 0402 +85°C Paper T/R", Capacitance=1uF, Case Code (Imperial)=0402, Case Code (Metric)=1005, Dielectric=X5R, Max Operating Temperature=85°C, Min Operating Temperature=-55°C, Package Quantity=1, Tolerance=10%, Voltage Rating=10V, Case/Package=0402, Contact Plating=Tin, Depth=0.5mm, Height=0.5mm, Length=1mm, Material=Ceramic, Mount="Surface Mount", Packaging="Tape and Reel", Radiation Hardening=No, Thickness=0.022inch, Width=0.02inch
C8 C23 C31: library part CMP-13271-002778-1, "Cap Ceramic 10uF 10V X5R ±20% SMD 0402 +85°C Paper T/R", Capacitance=10uF, Case Code (Imperial)=0402, Case Code (Metric)=1005, Max Operating Temperature=85°C, Min Operating Temperature=-55°C, Tolerance=20%, Voltage Rating=10V, Case/Package=0402, Length=0.039inch, Mount="Surface Mount", Packaging="Tape and Reel", Thickness=0.035inch, Width=0.02inch
C13 C28: library part CMP-2008-02699-2, "General Purpose Ceramic Capacitor, 0402, 1nF, 10%, X7R, 15%, 50V", Capacitance=1nF, Case Code (Imperial)=0402, Case Code (Metric)=1005, Dielectric=X7R, Insulation Resistance=100GR, Max Operating Temperature=125°C, Min Operating Temperature=-55°C, Package Quantity=1, Tolerance=10%, Voltage=50V, Case/Package=0402, Construction=Flat, Contact Plating=Tin, Depth=0.5mm, Dissipation Factor=2.5%, Height=0.56mm, Lead Free="Lead Free", Length=1mm, Mount="Surface Mount", Number of Pins=2, Packaging="Tape and Reel", Radiation Hardening=No, REACH SVHC="No SVHC", RoHS Compliant=Yes, Series=-, Termination=SMD/SMT, Thickness=0.022inch, Voltage Rating=50V, Voltage Rating (DC)=50V, Width=0.02inch
C14 C29: library part CMP-13271-000286-1, "Cap Ceramic 22uF 6.3V X5R ±20% SMD 0402 +85°C Paper T/R", Capacitance=22uF, Case Code (Imperial)=0402, Case Code (Metric)=1005, Max Operating Temperature=85°C, Min Operating Temperature=-55°C, Tolerance=20%, Voltage Rating=6.3V, Case/Package=0402, Length=0.039inch, Mount="Surface Mount", Packaging="Tape and Reel", Thickness=0.022inch, Width=0.02inch
C21: library part CMP-2008-04642-1, Capacitance=1.5nF, Manufacturer=Murata, Part Number=GRM155R71H152KA01D
C30: library part CMP-08246-000497-1, "Cap Ceramic 10nF 35V X7R 10% Pad SMD 0402 +125°C Automotive T/R", Capacitance=10nF, Case Code (Imperial)=0402, Case Code (Metric)=1005, Dielectric=X7R, Max Operating Temperature=125°C, Min Operating Temperature=-55°C, Tolerance=10%, Voltage Rating=35V, Case/Package=0402, Lead Free="Lead Free", Packaging="Tape and Reel", Termination=SMD/SMT, Voltage Rating (DC)=35V
C35: library part CMP-06035-048202-1, "Chip Multilayer Ceramic Capacitors for General Purpose, 0402, 2.2uF, X7R, 15%, 10%, 10V", Capacitance=2.2uF
C36 C38: library part CMP-13271-000548-1, "Cap Ceramic 4.7uF 10V X5R ±20% SMD 0402 +85°C Paper T/R", Capacitance=4.7uF, Case Code (Imperial)=0402, Case Code (Metric)=1005, Dielectric=X5R, Max Operating Temperature=85°C, Min Operating Temperature=-55°C, Package Quantity=10000, Tolerance=20%, Voltage Rating=10V, Case/Package=0402, Lead Free="Lead Free", Length=0.039inch, Mount="Surface Mount", Packaging="Tape and Reel", Thickness=0.022inch, Width=0.02inch
J3: library part DF40HC(3.0)-40DS-0.4V(51), "40 Position 0.4mm Pitch Dual Row Vertical Surface Mount (SMT) Pin Socket, 2.5mm Stacking Height", Package=None, Availability=Unavailable, MP=DF40HC(3.0)-40DS-0.4V(51), Price=None, System=Connector
J4: library part DF40HC(3.0)-50DS-0.4V(51), "50 Position 0.4mm Pitch Dual Row Vertical Surface Mount (SMT) Pin Socket, 2.5mm Stacking Height", Mfr_Name=Hirose, Copyright="Copyright (C) 2023 Ultra Librarian. All rights reserved.", Manufacturer_Part_Number=DF40HC(3.0)-50DS-0.4V(51), RefDes=RefDes, Type=DEV
J5 J25: "50 Position 0.4mm Pitch Dual Row Vertical Surface Mount (SMT) Receptacle", Current Rating=300mA, Max Operating Temperature=85°C, Min Operating Temperature=-35°C, Package Quantity=1, Voltage Rating=30V, Connector Type=Plug, Contact Material=Bronze, Contact Plating=Gold, Gender=Male, Housing Material=Polymer, Lead Free="Lead Free", Mated Stacking Heights=4mm, Mount="Surface Mount", Number of Contacts=40, Number of Positions=40, Number of Rows=2, Orientation=Straight, Packaging="Tape and Reel", Pitch=0.4mm, REACH SVHC="No SVHC", System=Connector, Termination=SMD/SMT
J6 J24: "50 Position 0.4mm Pitch Dual Row Vertical Surface Mount (SMT) Receptacle,", Mfr_Name=Hirose, Copyright="Copyright (C) 2023 Ultra Librarian. All rights reserved.", Manufacturer_Part_Number=DF40C-50DP-0.4V(51), RefDes=RefDes, System=Connector, Type=DEV
Q1: "PNP Switching Transistor", ComponentLink1Description="Manufacturer Link", ComponentLink1URL=http://www.semiconductors.philips.com/, ComponentLink2Description=Datasheet, ComponentLink2URL=http://www.semiconductors.philips.com/acrobat/datasheets/PMSS3906_4.pdf, DatasheetVersion=22-Apr-1999, LatestRevisionDate=12-Dec-2006, LatestRevisionNote="IPC-7351 Footprint Added.", PackageDescription="3-Pin SOT-323 Package 0.65 mm Pitch, 2.1 mm Lead Span", PackageReference=SOT323, PackageVersion=Apr-1999, Published=17-Sep-2003, Publisher="Altium Limited"
R1: library part CMP-02407-000443-1, "RES SMD 1M OHM 1% 1/10W 0402", Case Code (Imperial)=0402, Case Code (Metric)=1005, Max Operating Temperature=125°C, Max Power Dissipation=100mW, Min Operating Temperature=-55°C, Package Quantity=1, Power Rating=63mW, Resistance=1MR, Temperature Coefficient=50ppm/°C, Tolerance=1%, Voltage Rating=50V, Case/Package=0402, Composition="Thin Film", Contact Plating=Tin, Depth=0.5mm, Height=0.015inch, Lead Free="Lead Free", Length=1mm, Military Standard=Not, Mount="Surface Mount", Number of Terminations=2, Packaging="Tape and Reel", Radiation Hardening=No, REACH SVHC="No SVHC", Voltage Rating (DC)=50V, Weight=2.1E-05oz, Width=0.5mm
R2: library part CMP-03412-018483-1, "RES 45.3K OHM 1/16W .1% SMD 0402", Manufacturer=Yageo, Package=RT0402, Power Rating=0.063W, Resistance=45.3KΩ, Temperature="-55°C to +155°C", Temperature Coefficient="25 ppm/°C", Temperature Range High=+155°C, Temperature Range Low=-55°C, Tolerance=0.001, Voltage Rating=50V, Automotive=No, Category=Res, ComponentLink2Description=Datasheet, ComponentLink2URL=http://www.yageo.com/documents/recent/PYu-RT_1-to-0.01_RoHS_L_9.pdf, Composition="Thin Film", Device Class L1="Passive Components", Device Class L2=Resistors, Device Class L3="Chip SMD Resistors", Digikey Description="RES 45.3K OHM 1/16W .1% SMD 0402", Footprint Url=http://www.yageo.com/exep/pages/download/literatures/PYu-R_Mount_10.pdf, Height=0.35mm, Ipc Land Pattern Name=RESC10050X30, Lead Free=Yes, Manufacturer Part Number=RT0402BRD0745K3L, Mouser Description="Thin Film Resistors 1/16W 45.3K ohm .1% 25ppm", Octopart=https://octopart.com/rt0402brd0745k3l-yageo-1472491, RoHS=TRUE, Series=RT
R3: library part CMP-04015-050624-1, "200kΩ ±0.1% 0.063W, 1/16W Chip Resistor 0402 (1005 Metric) Moisture Resistant Thin Film", Resistance=200k
R4 R9 R10 R11 R12 R13 R14 R32 R33 R34 R35 R36: library part CMP-2002-07342-2, "RES SMD 0 OHM JUMPER 1/16W 0402", Case Code (Imperial)=0402, Case Code (Metric)=1005, Max Operating Temperature=155°C, Max Power Dissipation=63mW, Min Operating Temperature=-55°C, Power Rating=62.5mW, Resistance=0R, Resistor Type="Thick Film", Temperature Coefficient=200ppm/°C, Tolerance=1%, Voltage Rating=50V, Case/Package=0402, Contact Plating=Tin, Features="Moisture Resistant", Height=0.35mm, Lead Free="Lead Free", Length=1mm, Mount="Surface Mount", Number of Terminations=2, Packaging="Tape and Reel", Radiation Hardening=No, RoHS Compliant=Yes, Series=RC, Size Code=0402, Termination=SMD/SMT, Width=0.5mm
R5 R6 R7: library part CMP-2002-02901-2, "RES 4.70K OHM 1/16W 1% SMD 0402", Manufacturer=Yageo, Package=RT0402, Power Rating=0.063W, Resistance=4.7KΩ, Temperature="-55°C to +155°C", Temperature Coefficient="50 ppm/°C", Temperature Range High=+155°C, Temperature Range Low=-55°C, Tolerance=0.01, Voltage Rating=50V, Automotive=No, Category=Res, ComponentLink2Description=Datasheet, ComponentLink2URL=http://www.yageo.com/documents/recent/PYu-RT_1-to-0.01_RoHS_L_9.pdf, Composition="Thin Film", Device Class L1="Passive Components", Device Class L2=Resistors, Device Class L3="Chip SMD Resistors", Digikey Description="RES 4.70K OHM 1/16W 1% SMD 0402", Footprint Url=http://www.yageo.com/exep/pages/download/literatures/PYu-R_Mount_10.pdf, Height=0.35mm, Ipc Land Pattern Name=RESC10050X30, Lead Free=Yes, Manufacturer Part Number=RT0402FRE074K7L, Mouser Description="Res Thin Film 0402 4.7K Ohm 1% 1/16W ±50ppm/°C SMD Paper T/R", Octopart=https://octopart.com/rt0402fre074k7l-yageo-1371922, RoHS=TRUE, Series=RT
R8: library part CMP-2002-01632-2, "56kΩ ±0.5% 0.0625W 1/16W Chip Resistor 0402 (1005 Metric) Thin Film", Case Code (Imperial)=0402, Case Code (Metric)=1005, Max Operating Temperature=125°C, Max Power Dissipation=63mW, Min Operating Temperature=-55°C, Power Rating=62.5mW, Resistance=56k, Resistance Tolerance=0.5%, Resistor Type="Thin Film", Temperature Coefficient=25ppm/°C, Voltage Rating=25V, Case/Package=0402, Lead Free="Lead Free", Number of Pins=2, Number of Terminations=2, Packaging="Tape and Reel", RoHS Compliant=Yes, Series=RR, Size Code=0402, Termination=SMD/SMT, Tolerance=0.5%, Voltage Rating (DC)=25V
U1 U2: library part CMP-0003-00996-1, "8-Channel, 24-Bit ADC with Integrated Respiration Impedance and ECG Front End, -40 to 85 degC, 64-pin BGA (ZXG64), Green (RoHS & no Sb/Br)", Analog Voltage AV/DD(Max)(V)=5.25, Analog Voltage AV/DD(Min)(V)=2.7, Manufacturer="Texas Instruments", # Input Channels=8, Architecture=Delta-Sigma, ComponentLink1Description="Manufacturer URL", ComponentLink1URL=http://www.ti.com/, ComponentLink2Description=Datasheet, ComponentLink2URL=http://www.ti.com/general/docs/lit/getliterature.tsp?genericPartNumber=ADS1298R&fileType=pdf, ComponentLink3Description="Package Specification", ComponentLink3URL=http://www.ti.com/litv/pdf/mpbg581, DatasheetVersion=SBAS459I, Digital Supply(Max)(V)=3.6, Digital Supply(Min)(V)=1.65, Eco-Plan="Green (RoHS & no Sb/Br)", Interface="Serial SPI", Mounting Technology="Surface Mount", PackageDescription="64-Pin Plastic Ball Grid Array, Body 8 x 8 mm, Pitch 0.8 mm", PackageReference=ZXG64, PackageVersion="4206838/A, 02/2005", PartNumber=ADS1298RIZXGT, Resolution(Bits)=24, Sample Rate (max)(SPS)=32K, SNR(dB)=112, SubFamily="Precision ADC (<=10MSPS)"
U3: library part CMP-13559-000004-1, "IC VREF SERIES 0.3% SOT23-3", Case/Package=TO-236-3, Max Operating Temperature=85°C, Min Operating Temperature=-40°C, Min Output Voltage=2.048V, Operating Supply Current=1.5uA, Output Current=7mA, Temperature Coefficient=50ppm/°C, Tolerance=0.3%, Mount="Surface Mount", Output Type=Fixed, Packaging="Tape and Reel", Reference Type=Series, RoHS Compliant=Yes
U4: library part CMP-04918-000089-1, "IC REG CHARGE PUMP ADJ 8WSON", Ambient Temperature Range High=+85°C, Ambient Temperature Range Low=-40°C, Manufacturer="Texas Instruments", Max Junction Temp=+125°C, Max Supply Voltage=5.5V, Min Supply Voltage=2.7V, Negative Voltage Available=true, Nominal Supply Current=370uA, Output Current=250mA, Output Voltage=-5-1.5V, Package=DSG0008A, Switching Frequency=2MHz, Temperature="-40°C to +85°C", Automotive=No, Category=IC, ComponentLink2Description=Datasheet, ComponentLink2URL=http://www.ti.com/lit/ds/symlink/lm27761.pdf, Device Class L1="Integrated Circuits (ICs)", Device Class L2="Power Management ICs", Device Class L3="Voltage Regulators - Switching", Digikey Description="IC REG CHARGE PUMP ADJ 8WSON", Height=0.8mm, Lead Free=Yes, Manufacturer Part Number=LM27761DSGT, Mouser Description="Switching Voltage Regulators Low-Noise Regulated Switched Capacitor", Number Of Outputs=1, Octopart=https://octopart.com/lm27761dsgt-texas+instruments-66646294, Output Type=AdjustableProgrammable, RoHS=TRUE, Standoff Height=0mm, Switching Topology="Charge Pump", Temperature Range High=+85°C, Temperature Range Low=-40°C
U6: "Integrated Circuit", Manufacturer_Name="Texas Instruments", Mouser Part Number=595-TPS22916CYFPR, Arrow Part Number=TPS22916CYFPR, Arrow Price/Stock=https://www.arrow.com/en/products/tps22916cyfpr/texas-instruments?region=nac, Datasheet Link=http://www.ti.com/lit/gpn/tps22916, Height=0.5mm, Manufacturer_Part_Number=TPS22916CYFPR, Mouser Price/Stock=https://www.mouser.co.uk/ProductDetail/Texas-Instruments/TPS22916CYFPR?qs=EU6FO9ffTweddKR4NsfVQg%3D%3D
Y1: library part CMP-25159-259502-1, "MEMS OSC 2.048MHZ LVCMOS", Frequency=2.048MHz, Frequency Stability=50ppm, Max Operating Temperature=85°C, Min Operating Temperature=-40°C, Height=0.024inch, Length=0.061inch, Mount="Surface Mount", Packaging="Cut Tape", RoHS Compliant=Yes, Series=SiT8021, Width=0.033inch

## Via types
v1: diameter 0.25, hole 0.15, Top Layer to Bottom Layer, tented both sides, 585 vias
v2: diameter 0.25, hole 0.15, SIG2 to Bottom Layer, tented both sides, 41 vias
v3: diameter 0.25, hole 0.15, Top Layer to SIG1, tented both sides, 33 vias
v4: diameter 0.25, hole 0.15, Top Layer to Bottom Layer, 2 vias
v5: diameter 0.25, hole 0.15, Top Layer to GND/PWR1, tented both sides, 1 vias

## Nets (pads, with @x,y where several pads share a name; then routed paths per layer and width w, separated by ;. In a path a pad name is that pad's centre, name@x,y a point inside that pad or via, vN(x,y) a via of type N, cw(c..) or ccw(c..) an arc to the next point about the centre after c; other vN are vias at no path point)
1V8: C39.1 J4.6 J4.7 J6.6 J6.7 U6.A2 | length 17.1
  Top Layer w0.18: v1(8.25,4.05) 7.455,4.05 7.35,3.945 7.35,3.755 7.455,3.65 v1(7.85,3.65) J4.6@8.275,3.65
  SIG1 w0.7: 8.6,0.65 8.65,0.6 16.3,0.6 v1(16.425,0.725)
  SIG1 w0.8: v1(7.85,3.65) 7.766,3.65 7.225,3.109 7.225,1.7 8.275,0.65 8.6,0.65 ; v1@16.35,0.65 v1(16.425,0.725)
  Bottom Layer w0.18: J6.6@8.055,3.65 7.455,3.65 7.35,3.755 7.35,3.925 7.475,4.05 v1(8.25,4.05)
  Bottom Layer w0.2: 16.425,1.35 16.425,1.518 16.6,1.693 U6.A2@16.6,1.7
  Bottom Layer w0.4: C39.1@16.421,0.7 16.425,0.704 v1(16.425,0.725) 16.425,1.35